# Altium PCB AT89S52多功能板.PcbDoc (part 3 of 5)
Units mm, origin at the board's own origin, x right, y up, seen from the top; angles counter-clockwise.
Board outline 152.4 x 101.6 mm, 2 copper layers (Top Layer, Bottom Layer); 140 components, 143 nets, 570 pads, 50 vias.
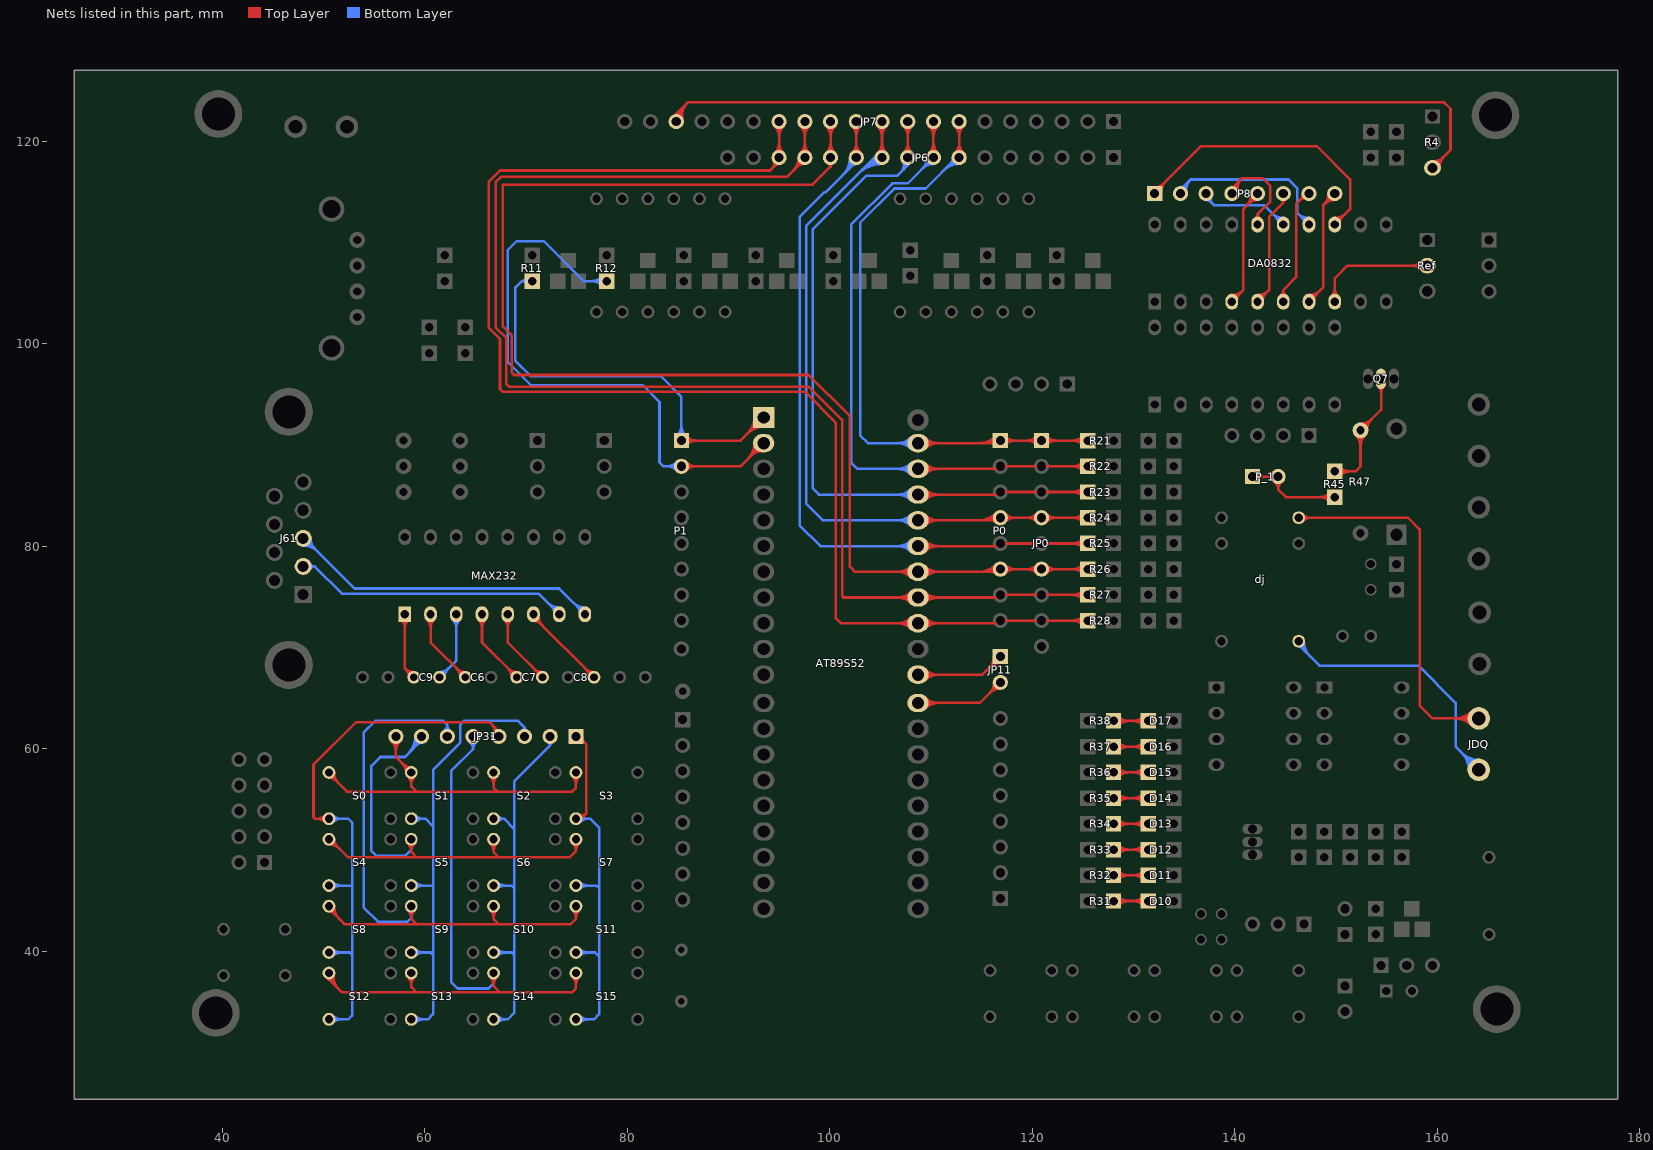
[diagram p3: the nets of this part, all layers, seen from the top]

## Via types
v1: diameter 1.27, hole 0.711, Top Layer to Bottom Layer, 50 vias

## Nets (pads, with @x,y where several pads share a name; then routed paths per layer and width w, separated by ;. In a path a pad name is that pad's centre, name@x,y a point inside that pad or via, vN(x,y) a via of type N, cw(c..) or ccw(c..) an arc to the next point about the centre after c; other vN are vias at no path point) (continued)
NetAT89S52_29: AT89S52.29 JP11.2 | length 17.6
  Top Layer w0.254: AT89S52.29@108.712,64.516 114.808,64.516 JP11.2@116.84,66.548 ; AT89S52.29@109.231,64.147 cw(c110.121,63.257) 110.121,64.516 cw(c110.121,65.775) AT89S52.29@109.231,64.885 ; AT89S52.29@109.41,63.968 cw(c110.734,62.644) 110.734,64.516 cw(c110.734,66.388) AT89S52.29@109.41,65.064 ; JP11.2@116.217,66.548 cw(c114.713,66.548) 115.776,65.484 cw(c116.84,64.421) JP11.2@116.84,65.925 ; JP11.2@116.471,66.548 cw(c115.58,66.548) 116.21,65.918 cw(c116.84,65.288) JP11.2@116.84,66.179
NetAT89S52_30: AT89S52.30 JP11.1 | length 17.5
  Top Layer w0.254: AT89S52.30@108.708,67.309 115.061,67.309 JP11.1@116.84,69.088 ; AT89S52.30@109.227,66.94 cw(c110.117,66.05) 110.117,67.309 cw(c110.117,68.568) AT89S52.30@109.227,67.678 ; AT89S52.30@109.406,66.761 cw(c110.73,65.437) 110.73,67.309 cw(c110.73,69.181) AT89S52.30@109.406,67.857 ; JP11.1@116.217,69.088 cw(c114.713,69.088) 115.776,68.024 cw(c116.84,66.961) JP11.1@116.84,68.465 ; JP11.1@116.471,69.088 cw(c115.58,69.088) 116.21,68.458 cw(c116.84,67.828) JP11.1@116.84,68.719
NetC6_1: C6.1 MAX232.2 | length 11.5
  Top Layer w0.254: MAX232.2@60.228,72.761 cw(c59.378,71.911) 60.58,71.911 cw(c61.782,71.911) MAX232.2@60.932,72.761 ; MAX232.2@60.58,73.275 60.58,70.484 C6.1@64.008,67.056 ; C6.1@63.5,67.056 ccw(c62.274,67.056) 63.141,67.923 ccw(c64.008,68.79) C6.1@64.008,67.564
NetC7_1: C7.1 MAX232.4 | length 11.5
  Top Layer w0.254: MAX232.4@65.308,72.761 cw(c64.458,71.911) 65.66,71.911 cw(c66.862,71.911) MAX232.4@66.012,72.761 ; MAX232.4@65.66,73.275 65.66,70.484 C7.1@69.088,67.056 ; C7.1@68.58,67.056 ccw(c67.354,67.056) 68.221,67.923 ccw(c69.088,68.79) C7.1@69.088,67.564
NetC7_2: C7.2 MAX232.5 | length 11.5
  Top Layer w0.254: MAX232.5@67.848,72.761 cw(c66.998,71.911) 68.2,71.911 cw(c69.402,71.911) MAX232.5@68.552,72.761 ; MAX232.5@68.2,73.275 68.2,70.484 C7.2@71.628,67.056 ; C7.2@71.12,67.056 ccw(c69.894,67.056) 70.761,67.923 ccw(c71.628,68.79) C7.2@71.628,67.564
NetC8_2: C8.2 MAX232.6 | length 13.1
  Top Layer w0.254: MAX232.6@70.74,72.615 cw(c70.74,71.627) 71.439,72.325 ; MAX232.6@70.74,73.275 70.74,73.024 C8.2@76.708,67.056 ; MAX232.6@70.984,73.113 ccw(c71.787,73.113) 71.219,72.545 ; MAX232.6@71.238,73.113 ccw(c72.655,73.113) 71.653,72.111 ; C8.2@76.2,67.056 ccw(c74.974,67.056) 75.841,67.923 ccw(c76.708,68.79) C8.2@76.708,67.564
NetC9_1: C9.1 MAX232.1 | length 10.4
  Top Layer w0.254: MAX232.1@57.688,72.761 cw(c56.838,71.911) 58.04,71.911 cw(c59.242,71.911) MAX232.1@58.392,72.761 ; MAX232.1@58.04,73.275 58.04,67.944 C9.1@58.928,67.056 ; C9.1@58.42,67.056 ccw(c57.194,67.056) 58.061,67.923 ccw(c58.928,68.79) C9.1@58.928,67.564
NetC9_2: C9.2 MAX232.3 | length 10.7
  Bottom Layer w0.254: C9.2@61.468,67.056 63.12,68.708 MAX232.3@63.12,73.275 ; C9.2@61.468,67.564 ccw(c61.468,68.79) 62.335,67.923 ccw(c63.202,67.056) C9.2@61.976,67.056 ; MAX232.3@62.768,72.761 cw(c61.918,71.911) 63.12,71.911 cw(c64.322,71.911) MAX232.3@63.472,72.761
NetD10_2: D10.2 R31.2 | length 11.3
  Top Layer w0.254: R31.2@128.016,44.958 D10.2@131.445,44.958 D10.2@131.318,44.831 ; R31.2@128.285,44.689 cw(c128.936,44.038) 128.936,44.958 cw(c128.936,45.878) R31.2@128.285,45.227 ; R31.2@128.465,44.509 cw(c129.549,43.425) 129.549,44.958 cw(c129.549,46.491) R31.2@128.465,45.407 ; D10.2@130.996,44.509 ccw(c129.912,43.425) 129.912,44.958 ccw(c129.912,46.491) D10.2@130.996,45.407 ; D10.2@131.176,44.689 ccw(c130.525,44.038) 130.525,44.958 ccw(c130.525,45.878) D10.2@131.176,45.227
NetD11_2: D11.2 R32.2 | length 11.3
  Top Layer w0.254: R32.2@128.016,47.498 D11.2@131.445,47.498 D11.2@131.318,47.371 ; R32.2@128.285,47.229 cw(c128.936,46.578) 128.936,47.498 cw(c128.936,48.418) R32.2@128.285,47.767 ; R32.2@128.465,47.049 cw(c129.549,45.965) 129.549,47.498 cw(c129.549,49.031) R32.2@128.465,47.947 ; D11.2@130.996,47.049 ccw(c129.912,45.965) 129.912,47.498 ccw(c129.912,49.031) D11.2@130.996,47.947 ; D11.2@131.176,47.229 ccw(c130.525,46.578) 130.525,47.498 ccw(c130.525,48.418) D11.2@131.176,47.767
NetD12_2: D12.2 R33.2 | length 11.3
  Top Layer w0.254: R33.2@128.016,50.038 D12.2@131.445,50.038 D12.2@131.318,49.911 ; R33.2@128.285,49.769 cw(c128.936,49.118) 128.936,50.038 cw(c128.936,50.958) R33.2@128.285,50.307 ; R33.2@128.465,49.589 cw(c129.549,48.505) 129.549,50.038 cw(c129.549,51.571) R33.2@128.465,50.487 ; D12.2@130.996,49.589 ccw(c129.912,48.505) 129.912,50.038 ccw(c129.912,51.571) D12.2@130.996,50.487 ; D12.2@131.176,49.769 ccw(c130.525,49.118) 130.525,50.038 ccw(c130.525,50.958) D12.2@131.176,50.307
NetD13_2: D13.2 R34.2 | length 11.3
  Top Layer w0.254: R34.2@128.016,52.578 D13.2@131.445,52.578 D13.2@131.318,52.451 ; R34.2@128.285,52.309 cw(c128.936,51.658) 128.936,52.578 cw(c128.936,53.498) R34.2@128.285,52.847 ; R34.2@128.465,52.129 cw(c129.549,51.045) 129.549,52.578 cw(c129.549,54.111) R34.2@128.465,53.027 ; D13.2@130.996,52.129 ccw(c129.912,51.045) 129.912,52.578 ccw(c129.912,54.111) D13.2@130.996,53.027 ; D13.2@131.176,52.309 ccw(c130.525,51.658) 130.525,52.578 ccw(c130.525,53.498) D13.2@131.176,52.847
NetD14_2: D14.2 R35.2 | length 11.1
  Top Layer w0.254: R35.2@128.016,55.118 D14.2@131.445,55.118 ; R35.2@128.285,54.849 cw(c128.936,54.198) 128.936,55.118 cw(c128.936,56.038) R35.2@128.285,55.387 ; R35.2@128.465,54.669 cw(c129.549,53.585) 129.549,55.118 cw(c129.549,56.651) R35.2@128.465,55.567 ; D14.2@130.996,54.669 ccw(c129.912,53.585) 129.912,55.118 ccw(c129.912,56.651) D14.2@130.996,55.567 ; D14.2@131.176,54.849 ccw(c130.525,54.198) 130.525,55.118 ccw(c130.525,56.038) D14.2@131.176,55.387
NetD15_2: D15.2 R36.2 | length 11.3
  Top Layer w0.254: R36.2@128.016,57.658 D15.2@131.445,57.658 D15.2@131.318,57.531 ; R36.2@128.285,57.389 cw(c128.936,56.738) 128.936,57.658 cw(c128.936,58.578) R36.2@128.285,57.927 ; R36.2@128.465,57.209 cw(c129.549,56.125) 129.549,57.658 cw(c129.549,59.191) R36.2@128.465,58.107 ; D15.2@130.996,57.209 ccw(c129.912,56.125) 129.912,57.658 ccw(c129.912,59.191) D15.2@130.996,58.107 ; D15.2@131.176,57.389 ccw(c130.525,56.738) 130.525,57.658 ccw(c130.525,58.578) D15.2@131.176,57.927
NetD16_2: D16.2 R37.2 | length 11.1
  Top Layer w0.254: R37.2@128.016,60.198 D16.2@131.445,60.198 ; R37.2@128.285,59.929 cw(c128.936,59.278) 128.936,60.198 cw(c128.936,61.118) R37.2@128.285,60.467 ; R37.2@128.465,59.749 cw(c129.549,58.665) 129.549,60.198 cw(c129.549,61.731) R37.2@128.465,60.647 ; D16.2@130.996,59.749 ccw(c129.912,58.665) 129.912,60.198 ccw(c129.912,61.731) D16.2@130.996,60.647 ; D16.2@131.176,59.929 ccw(c130.525,59.278) 130.525,60.198 ccw(c130.525,61.118) D16.2@131.176,60.467
NetD17_2: D17.2 R38.2 | length 11.3
  Top Layer w0.254: R38.2@128.016,62.738 D17.2@131.445,62.738 D17.2@131.318,62.611 ; R38.2@128.285,62.469 cw(c128.936,61.818) 128.936,62.738 cw(c128.936,63.658) R38.2@128.285,63.007 ; R38.2@128.465,62.289 cw(c129.549,61.205) 129.549,62.738 cw(c129.549,64.271) R38.2@128.465,63.187 ; D17.2@130.996,62.289 ccw(c129.912,61.205) 129.912,62.738 ccw(c129.912,64.271) D17.2@130.996,63.187 ; D17.2@131.176,62.469 ccw(c130.525,61.818) 130.525,62.738 ccw(c130.525,63.658) D17.2@131.176,63.007
NetDA0832_4: DA0832.4 P8.5 | length 17.7
  Top Layer w0.254: DA0832.4@139.701,104.136 140.843,105.278 140.843,113.284 142.24,114.681 P8.5@142.24,114.808 ; DA0832.4@139.701,104.543 ccw(c139.701,105.524) 140.395,104.83 ; DA0832.4@139.701,104.797 ccw(c139.701,106.391) 140.828,105.264 ; DA0832.4@140.199,104.299 cw(c141.009,104.299) 140.436,104.872 ; 141.087,113.528 ccw(c139.806,114.808) P8.5@141.617,114.808 ; 141.393,113.834 cw(c142.24,112.988) P8.5@142.24,114.185 ; 141.52,113.961 ccw(c140.674,114.808) P8.5@141.871,114.808
NetDA0832_5: DA0832.5 P8.6 | length 16.2
  Top Layer w0.254: DA0832.5@142.241,104.136 143.383,105.278 143.383,112.522 144.78,113.919 ; DA0832.5@142.241,104.543 ccw(c142.241,105.524) 142.935,104.83 ; DA0832.5@142.241,104.797 ccw(c142.241,106.391) 143.368,105.264 ; DA0832.5@142.739,104.299 cw(c143.549,104.299) 142.976,104.872 ; P8.6@144.526,114.808 P8.6@144.78,114.808 144.78,113.919 ; 144.78,113.919 ccw(c144.457,113.919) 144.567,114.222 cw(c144.457,113.919) 144.78,113.919 ; 144.78,113.919 cw(c145.103,113.919) 144.993,114.222 ccw(c145.103,113.919) 144.78,113.919
NetDA0832_6: DA0832.6 P8.7 | length 16.4
  Top Layer w0.254: DA0832.6@144.781,104.136 144.781,105.284 ; 146.325,114.067 cw(c147.229,113.163) P8.7@147.3,114.44 ; 146.436,114.178 ccw(c145.806,114.808) P8.7@146.697,114.808 ; P8.7@147.32,114.808 147.066,114.808 146.05,113.792 146.05,106.553 144.781,105.284 ; 144.781,105.284 ccw(c145.507,105.284) 145.076,104.7 cw(c145.507,105.284) 144.781,105.284 ; 144.781,105.284 cw(c144.055,105.284) 144.486,104.7 ccw(c144.055,105.284) 144.781,105.284
NetDA0832_7: DA0832.7 P8.8 | length 18.1
  Top Layer w0.254: DA0832.7@147.321,104.136 148.717,105.532 148.717,113.665 P8.8@149.86,114.808 ; DA0832.7@147.321,104.543 ccw(c147.321,105.524) 148.015,104.83 ; DA0832.7@147.321,104.797 ccw(c147.321,106.391) 148.448,105.264 ; DA0832.7@147.819,104.299 cw(c148.629,104.299) 148.056,104.872 ; P8.8@149.237,114.808 cw(c147.733,114.808) 148.796,113.744 cw(c149.86,112.681) P8.8@149.86,114.185 ; P8.8@149.491,114.808 cw(c148.6,114.808) 149.23,114.178 cw(c149.86,113.548) P8.8@149.86,114.439
NetDA0832_8: DA0832.8 Ref.3 | length 17.7
  Top Layer w0.254: DA0832.8@149.509,104.651 ccw(c148.659,105.501) 149.861,105.501 ccw(c151.063,105.501) DA0832.8@150.213,104.651 ; DA0832.8@149.861,104.136 149.861,106.427 151.13,107.696 Ref.3@159.004,107.696 ; Ref.3@158.491,107.247 ccw(c157.407,106.163) 157.407,107.696 ccw(c157.407,109.229) Ref.3@158.491,108.145 ; Ref.3@158.671,107.427 ccw(c158.021,106.776) 158.021,107.696 ccw(c158.021,108.616) Ref.3@158.671,107.965
NetDA0832_13: DA0832.13 P8.1 | length 33.7
  Top Layer w0.254: P8.1@132.08,114.808 132.08,114.935 136.652,119.507 148.082,119.507 151.384,116.205 151.384,113.279 DA0832.13@149.861,111.756 DA0832.13@149.86,111.757 ; P8.1@132.08,115.431 ccw(c132.08,116.628) 132.927,115.782 ; P8.1@132.449,114.808 cw(c133.646,114.808) 132.8,115.655 ; P8.1@132.703,114.808 cw(c134.514,114.808) 133.233,116.088 ; DA0832.13@149.861,112.163 ccw(c149.861,113.144) 150.555,112.45 ; DA0832.13@149.861,112.417 ccw(c149.861,114.011) 150.988,112.884 ; DA0832.13@150.359,111.919 cw(c151.169,111.919) 150.596,112.492
NetDA0832_14: DA0832.14 P8.2 | length 22.9
  Top Layer w0.254: DA0832.14@147.32,111.757 DA0832.14@147.321,111.756
  Bottom Layer w0.254: P8.2@134.62,114.808 134.62,115.189 135.636,116.205 ; P8.2@134.62,115.431 ccw(c134.62,116.015) 135.033,115.602 ; P8.2@134.733,114.828 cw(c135.501,114.967) 134.949,115.518 ; P8.2@134.983,114.873 cw(c136.082,115.072) 135.293,115.862 ; P8.2@135.233,114.919 cw(c136.664,115.177) 135.636,116.205 ; 146.258,112.819 ccw(c147.234,113.795) DA0832.14@147.298,112.416 ; 146.586,112.491 cw(c146.013,111.919) DA0832.14@146.823,111.919 ; 146.665,112.412 ccw(c147.27,113.017) DA0832.14@147.31,112.162 ; DA0832.14@147.321,111.756 146.177,112.9 146.177,115.316 145.288,116.205 135.636,116.205
NetDA0832_15: DA0832.15 P8.3 | length 15.3
  Top Layer w0.254: DA0832.15@144.78,111.757 DA0832.15@144.904,111.633
  Bottom Layer w0.254: P8.3@137.16,114.808 137.16,114.427 137.922,113.665 142.872,113.665 DA0832.15@144.781,111.756 ; 143.654,112.884 ccw(c144.781,114.011) DA0832.15@144.781,112.417 ; 144.046,112.491 cw(c143.473,111.919) DA0832.15@144.283,111.919 ; 144.087,112.45 ccw(c144.781,113.144) DA0832.15@144.781,112.163 ; P8.3@137.16,114.185 cw(c137.16,113.601) 137.573,114.014 ccw(c137.16,113.601) P8.3@137.16,114.185 ; P8.3@137.465,114.6 ccw(c137.809,114.366) 137.515,114.072 cw(c137.809,114.366) P8.3@137.465,114.6 ; P8.3@137.675,114.457 ccw(c138.067,114.191) 137.731,113.856 cw(c138.067,114.191) P8.3@137.675,114.457
NetDA0832_16: DA0832.16 P8.4 | length 15.1
  Top Layer w0.254: P8.4@139.7,114.808 139.7,115.316 140.716,116.332 ; P8.4@139.812,114.833 cw(c140.706,115.028) 140.059,115.675 ; P8.4@140.06,114.887 cw(c141.245,115.146) 140.388,116.004 ; P8.4@140.309,114.941 cw(c141.784,115.264) 140.716,116.332 ; DA0832.16@142.24,111.757 DA0832.16@142.241,111.756 142.241,112.777 ; 140.716,116.332 142.748,116.332 143.51,115.57 143.51,114.046 142.241,112.777 ; 142.241,112.777 ccw(c142.732,112.777) 142.488,112.351 cw(c142.732,112.777) 142.241,112.777 ; 142.241,112.777 cw(c141.75,112.777) 141.994,112.351 ccw(c141.75,112.777) 142.241,112.777
Netdj_2: dj.2 JDQ.1 | length 46.4
  Top Layer w0.254: dj.2@146.304,82.804 157.099,82.804 158.242,81.661 158.242,64.262 159.512,62.992 JDQ.1@164.084,62.992 ; dj.2@146.663,82.445 cw(c147.53,81.578) 147.53,82.804 cw(c147.53,84.03) dj.2@146.663,83.163 ; JDQ.1@163.388,62.296 ccw(c161.706,60.614) 161.706,62.992 ccw(c161.706,65.37) JDQ.1@163.388,63.688 ; JDQ.1@163.567,62.475 ccw(c162.319,61.227) 162.319,62.992 ccw(c162.319,64.757) JDQ.1@163.567,63.509 ; JDQ.1@163.747,62.655 ccw(c162.932,61.84) 162.932,62.992 ccw(c162.932,64.144) JDQ.1@163.747,63.329
Netdj_4: dj.4 JDQ.2 | length 38
  Bottom Layer w0.254: dj.4@146.304,70.104 cw(c146.304,69.797) 146.521,70.014 ; dj.4@146.558,70.612 ccw(c148.091,70.612) 147.007,69.528 ; 146.573,69.962 cw(c147.224,70.612) dj.4@146.304,70.612 146.304,70.231 148.336,68.199 158.115,68.199 161.798,64.516 161.798,60.198 JDQ.2@164.084,57.912 ; dj.4@146.812,70.612 ccw(c148.958,70.612) 147.441,69.094 ; JDQ.2@163.099,57.912 ccw(c160.721,57.912) 162.403,59.593 ccw(c164.084,61.275) JDQ.2@164.084,58.897 ; JDQ.2@163.353,57.912 ccw(c161.588,57.912) 162.836,59.16 ccw(c164.084,60.408) JDQ.2@164.084,58.643 ; JDQ.2@163.607,57.912 ccw(c162.455,57.912) 163.27,58.726 ccw(c164.084,59.541) JDQ.2@164.084,58.389
NetJ61_2: J61.2 MAX232.7 | length 32.2
  Bottom Layer w0.254: J61.2@48.004,78.002 49.125,78.002 ; 72.153,74.403 ccw(c73.28,75.53) MAX232.7@73.28,73.936 ; 72.545,74.011 cw(c71.972,73.438) MAX232.7@72.782,73.438 ; 72.586,73.969 ccw(c73.28,74.663) MAX232.7@73.28,73.682 ; MAX232.7@73.28,73.275 71.244,75.311 51.816,75.311 49.125,78.002 ; 49.125,78.002 ccw(c49.125,77.486) 48.656,77.702 cw(c49.125,77.486) 49.125,78.002 ; 49.125,78.002 cw(c49.125,78.518) 48.656,78.302 ccw(c49.125,78.518) 49.125,78.002
NetJ61_3: J61.3 MAX232.8 | length 38.1
  Bottom Layer w0.254: J61.3@48.004,80.054 cw(c48.004,78.009) 49.45,79.455 ; J61.3@48.004,80.308 cw(c48.004,78.876) 49.016,79.889 ; J61.3@48.004,80.772 48.133,80.772 53.086,75.819 73.276,75.819 MAX232.8@75.82,73.275 ; J61.3@48.468,80.772 ccw(c49.277,80.772) 48.705,80.2 ; J61.3@48.722,80.772 ccw(c50.144,80.772) 49.139,79.766 ; 74.693,74.403 ccw(c75.82,75.53) MAX232.8@75.82,73.936 ; 75.085,74.011 cw(c74.512,73.438) MAX232.8@75.322,73.438 ; 75.126,73.969 ccw(c75.82,74.663) MAX232.8@75.82,73.682
NetJP7_18: JP7.18 R4.2 | length 95.1
  Top Layer w0.254: JP7.18@84.7,121.892 cw(c85.705,122.099) 84.979,122.825 ; JP7.18@84.836,121.92 84.836,122.682 ; JP7.18@84.949,121.943 cw(c86.258,122.213) 85.313,123.159 ; JP7.18@85.197,121.995 cw(c86.81,122.327) 85.646,123.492 ; JP7.18@85.446,122.046 cw(c87.363,122.441) 85.979,123.825 ; R4.2@159.512,117.348 161.29,119.126 161.29,123.19 160.655,123.825 85.979,123.825 ; R4.2@159.576,117.729 ccw(c159.576,118.496) 160.118,117.954 ; R4.2@159.576,117.983 ccw(c159.576,119.363) 160.551,118.387 ; R4.2@159.957,117.348 cw(c161.03,117.348) 160.271,118.107 ; R4.2@160.21,117.348 cw(c161.897,117.348) 160.704,118.54 ; 84.836,122.682 ccw(c84.99,122.682) 84.96,122.531 cw(c84.99,122.682) 84.836,122.682 ; 84.836,122.682 cw(c84.682,122.682) 84.712,122.531 ccw(c84.682,122.682) 84.836,122.682 ; 84.836,122.682 85.979,123.825
NetJP31_1: JP31.1 S3.2 S7.2 S11.2 S15.2 | length 50.1
  Top Layer w0.254: S3.2@74.93,53.086 75.438,53.086 75.946,53.594 ; JP31.1@74.93,61.214 75.184,61.214 75.946,60.452 75.946,53.594 ; JP31.1@75.015,60.855 cw(c75.197,60.092) 75.751,60.647 ; JP31.1@75.553,61.214 ccw(c76.444,61.214) 75.814,60.584 ; 75.946,53.594 cw(c75.525,54.015) 75.204,53.514 ccw(c75.525,54.015) 75.946,53.594 ; S3.2@75.067,53.3 ccw(c75.351,53.743) 75.723,53.371 cw(c75.351,53.743) S3.2@75.067,53.3
  Bottom Layer w0.254: S15.2@74.93,33.274 76.708,33.274 77.216,33.782 77.216,52.197 76.327,53.086 S3.2@74.93,53.086 ; S11.2@74.93,39.878 76.835,39.878 77.216,39.497 ; S7.2@74.93,46.482 76.962,46.482 77.216,46.228 ; S15.2@75.289,32.915 cw(c76.156,32.048) 76.156,33.274 cw(c76.156,34.5) S15.2@75.289,33.633 ; S11.2@75.289,39.519 cw(c76.156,38.652) 76.156,39.878 cw(c76.156,41.104) S11.2@75.289,40.237 ; S7.2@75.289,46.123 cw(c76.156,45.256) 76.156,46.482 cw(c76.156,47.708) S7.2@75.289,46.841 ; S3.2@75.289,52.727 cw(c76.156,51.86) 76.156,53.086 cw(c76.156,54.312) S3.2@75.289,53.445
NetJP31_2: JP31.2 S2.2 S6.2 S10.2 S14.2 | length 46.6
  Bottom Layer w0.254: S14.2@66.802,33.274 68.199,33.274 68.834,33.909 68.834,56.769 72.39,60.325 ; S10.2@66.802,39.878 68.58,39.878 68.834,39.624 ; S6.2@66.802,46.482 68.58,46.482 68.834,46.228 ; S2.2@66.802,53.086 67.818,53.086 ; S14.2@67.161,32.915 cw(c68.028,32.048) 68.028,33.274 cw(c68.028,34.5) S14.2@67.161,33.633 ; S10.2@67.161,39.519 cw(c68.028,38.652) 68.028,39.878 cw(c68.028,41.104) S10.2@67.161,40.237 ; S6.2@67.161,46.123 cw(c68.028,45.256) 68.028,46.482 cw(c68.028,47.708) S6.2@67.161,46.841 ; S2.2@67.208,52.781 cw(c67.818,52.324) 67.818,53.086 ; S2.2@67.208,53.391 ccw(c67.818,53.848) 67.818,53.086 ; 68.834,52.07 67.818,53.086 ; JP31.2@72.39,61.214 72.39,60.325 ; 72.39,60.325 ccw(c72.067,60.325) 72.177,60.628 cw(c72.067,60.325) 72.39,60.325 ; 72.39,60.325 cw(c72.713,60.325) 72.603,60.628 ccw(c72.713,60.325) 72.39,60.325
NetJP31_3: JP31.3 S1.2 S5.2 S9.2 S13.2 | length 55.8
  Bottom Layer w0.254: S13.2@58.674,33.274 60.325,33.274 60.833,33.782 60.833,57.912 63.5,60.579 63.5,62.357 63.881,62.738 69.215,62.738 69.85,62.103 ; S9.2@58.674,39.878 60.579,39.878 60.833,39.624 ; S5.2@58.674,46.482 60.706,46.482 ; S1.2@58.674,53.086 60.071,53.086 60.833,52.324 ; S13.2@59.033,32.915 cw(c59.9,32.048) 59.9,33.274 cw(c59.9,34.5) S13.2@59.033,33.633 ; S9.2@59.033,39.519 cw(c59.9,38.652) 59.9,39.878 cw(c59.9,41.104) S9.2@59.033,40.237 ; S5.2@59.033,46.123 cw(c59.9,45.256) 59.9,46.482 cw(c59.9,47.708) S5.2@59.033,46.841 ; S1.2@59.033,52.727 cw(c59.9,51.86) 59.9,53.086 cw(c59.9,54.312) S1.2@59.033,53.445 ; JP31.3@69.85,61.214 69.85,62.103 ; 69.85,62.103 ccw(c70.173,62.103) 70.063,61.8 cw(c70.173,62.103) 69.85,62.103 ; 69.85,62.103 cw(c69.527,62.103) 69.637,61.8 ccw(c69.527,62.103) 69.85,62.103
NetJP31_4: JP31.4 S0.2 S4.2 S8.2 S12.2 | length 68.2
  Top Layer w0.254: S0.2@50.187,52.727 ccw(c49.32,51.86) 49.32,53.086 ccw(c49.32,54.312) S0.2@50.187,53.445 ; S0.2@50.546,53.086 49.149,53.086 49.022,53.213 49.022,58.42 53.213,62.611 66.421,62.611 67.31,61.722 JP31.4@67.31,61.214 ; 66.528,62.504 cw(c65.49,61.466) JP31.4@66.944,61.265 ; 66.89,62.142 cw(c66.125,61.378) JP31.4@67.196,61.23
  Bottom Layer w0.254: S12.2@50.546,33.274 52.451,33.274 52.832,33.655 52.832,52.705 52.451,53.086 S0.2@50.546,53.086 ; S8.2@50.546,39.878 52.578,39.878 52.832,39.624 ; S4.2@50.546,46.482 52.705,46.482 ; S12.2@50.905,32.915 cw(c51.772,32.048) 51.772,33.274 cw(c51.772,34.5) S12.2@50.905,33.633 ; S8.2@50.905,39.519 cw(c51.772,38.652) 51.772,39.878 cw(c51.772,41.104) S8.2@50.905,40.237 ; S4.2@50.905,46.123 cw(c51.772,45.256) 51.772,46.482 cw(c51.772,47.708) S4.2@50.905,46.841 ; S0.2@50.905,52.727 cw(c51.772,51.86) 51.772,53.086 cw(c51.772,54.312) S0.2@50.905,53.445
NetJP31_5: JP31.5 S12.1 S13.1 S14.1 S15.1 | length 76.6
  Top Layer w0.254: S12.1@50.795,37.797 ccw(c52.106,37.54) 51.161,36.596 ; 50.824,36.933 cw(c51.542,37.651) S12.1@50.546,37.846 50.546,37.211 51.816,35.941 74.549,35.941 74.93,36.322 S15.1@74.93,37.846 ; S12.1@51.044,37.748 ccw(c52.669,37.429) 51.498,36.259 ; S13.1@58.315,37.487 cw(c57.448,36.62) 58.674,36.62 cw(c59.9,36.62) S13.1@59.033,37.487 ; S13.1@58.674,37.846 58.674,36.449 59.182,35.941 ; S14.1@66.443,37.487 cw(c65.576,36.62) 66.802,36.62 cw(c68.028,36.62) S14.1@67.161,37.487 ; S14.1@66.802,37.846 66.802,36.576 67.437,35.941 ; S15.1@74.571,37.487 cw(c73.704,36.62) 74.93,36.62 cw(c76.156,36.62) S15.1@75.289,37.487
  Bottom Layer w0.254: JP31.5@64.389,60.721 cw(c63.787,59.944) 64.77,59.944 ; JP31.5@64.516,61.214 JP31.5@64.77,61.214 64.77,59.944 ; JP31.5@64.544,60.922 cw(c64.188,60.462) 64.77,60.462 cw(c65.352,60.462) JP31.5@64.996,60.922 ; JP31.5@65.151,60.721 ccw(c65.753,59.944) 64.77,59.944 ; S14.1@66.497,37.44 cw(c66.04,36.83) 66.802,36.83 ; S14.1@66.802,37.846 66.802,36.83 ; S14.1@67.107,37.44 ccw(c67.564,36.83) 66.802,36.83 ; 64.77,59.944 62.611,57.785 62.611,36.957 63.246,36.322 66.294,36.322 66.802,36.83
NetJP31_6: JP31.6 S8.1 S9.1 S10.1 S11.1 | length 76.6
  Top Layer w0.254: S8.1@50.546,43.942 cw(c50.546,43.329) 50.98,43.762 ; S8.1@50.546,44.45 50.546,44.196 52.07,42.672 74.422,42.672 74.93,43.18 S11.1@74.93,44.45 ; S8.1@50.8,44.45 ccw(c52.026,44.45) 51.159,43.583 ; S8.1@51.054,44.45 ccw(c52.894,44.45) 51.593,43.149 ; S9.1@58.315,44.091 cw(c57.448,43.224) 58.674,43.224 cw(c59.9,43.224) S9.1@59.033,44.091 ; S9.1@58.674,44.45 58.674,43.18 59.182,42.672 ; S10.1@66.443,44.091 cw(c65.576,43.224) 66.802,43.224 cw(c68.028,43.224) S10.1@67.161,44.091 ; S10.1@66.802,44.45 66.802,43.18 67.31,42.672 ; S11.1@74.571,44.091 cw(c73.704,43.224) 74.93,43.224 cw(c76.156,43.224) S11.1@75.289,44.091
  Bottom Layer w0.254: S9.1@58.334,44.073 cw(c57.642,43.307) 58.674,43.307 ; S9.1@58.674,44.45 58.674,43.307 ; S9.1@59.014,44.073 ccw(c59.706,43.307) 58.674,43.307 ; JP31.6@61.892,61.738 ccw(c61.493,62.357) 62.23,62.357 ; JP31.6@62.103,61.214 JP31.6@62.23,61.214 62.23,62.357 ; JP31.6@62.568,61.738 cw(c62.967,62.357) 62.23,62.357 ; 58.674,43.307 58.293,42.926 55.372,42.926 53.975,44.323 53.975,61.595 55.118,62.738 61.849,62.738 62.23,62.357
NetJP31_7: JP31.7 S4.1 S5.1 S6.1 S7.1 | length 65.1
  Top Layer w0.254: S4.1@50.546,50.546 cw(c50.546,49.013) 51.63,50.097 ; S4.1@50.546,50.8 cw(c50.546,49.88) 51.196,50.531 ; S4.1@50.546,51.054 50.673,51.054 52.451,49.276 74.295,49.276 74.93,49.911 ; S4.1@51.054,51.054 ccw(c51.974,51.054) 51.323,50.404 ; S5.1@58.315,50.695 cw(c57.448,49.828) 58.674,49.828 cw(c59.9,49.828) S5.1@59.033,50.695 ; S5.1@58.674,51.054 58.674,49.784 59.182,49.276 ; S6.1@66.443,50.695 cw(c65.576,49.828) 66.802,49.828 cw(c68.028,49.828) S6.1@67.161,50.695 ; S6.1@66.802,51.054 66.802,49.784 67.31,49.276 ; S7.1@74.59,50.677 cw(c73.898,49.911) 74.93,49.911 ; S7.1@74.93,51.054 74.93,49.911 ; S7.1@75.27,50.677 ccw(c75.962,49.911) 74.93,49.911
  Bottom Layer w0.254: 58.357,59.5 ccw(c56.643,61.214) JP31.7@59.067,61.214 ; S5.1@58.369,50.648 cw(c57.912,50.038) 58.674,50.038 ; S5.1@58.674,51.054 58.674,50.038 ; 58.791,59.934 ccw(c57.51,61.214) JP31.7@59.321,61.214 ; S5.1@58.979,50.648 ccw(c59.436,50.038) 58.674,50.038 ; 59.224,60.367 ccw(c58.378,61.214) JP31.7@59.575,61.214 ; 59.277,60.42 cw(c59.69,60.007) JP31.7@59.69,60.591 ; JP31.7@59.69,61.214 59.69,60.833 58.039,59.182 55.626,59.182 54.737,58.293 54.737,49.911 55.245,49.403 58.039,49.403 58.674,50.038
NetJP31_8: JP31.8 S0.1 S1.1 S2.1 S3.1 | length 49.4
  Top Layer w0.254: S0.1@50.546,57.15 cw(c50.546,56.23) 51.196,56.881 ; S0.1@50.546,57.658 50.546,57.531 52.324,55.753 74.549,55.753 74.93,56.134 S3.1@74.93,57.658 ; S0.1@50.8,57.658 ccw(c51.72,57.658) 51.069,57.008 ; S0.1@51.054,57.658 ccw(c52.587,57.658) 51.503,56.574 ; JP31.8@56.709,60.773 cw(c55.646,59.71) 57.15,59.71 cw(c58.654,59.71) JP31.8@57.591,60.773 ; JP31.8@56.889,60.953 cw(c56.259,60.323) 57.15,60.323 cw(c58.041,60.323) JP31.8@57.411,60.953 ; JP31.8@57.15,61.214 57.15,59.182 S1.1@58.674,57.658 58.674,56.261 59.182,55.753 ; S1.1@58.166,57.658 ccw(c56.94,57.658) 57.807,58.525 ccw(c58.674,59.392) S1.1@58.674,58.166 ; S1.1@58.315,57.299 cw(c57.448,56.432) 58.674,56.432 cw(c59.9,56.432) S1.1@59.033,57.299 ; S2.1@66.443,57.299 cw(c65.576,56.432) 66.802,56.432 cw(c68.028,56.432) S2.1@67.161,57.299 ; S2.1@66.802,57.658 66.802,56.134 67.183,55.753 ; S3.1@74.571,57.299 cw(c73.704,56.432) 74.93,56.432 cw(c76.156,56.432) S3.1@75.289,57.299
NetP_1_2: P_1.1 P_1.2 R45.2 | length 16.4
  Top Layer w0.254: P_1.1@141.732,86.868 P_1.2@144.272,86.868 144.272,85.598 ; P_1.2@143.891,86.375 cw(c143.289,85.598) 144.272,85.598 ; P_1.2@144.046,86.576 cw(c143.69,86.116) 144.272,86.116 cw(c144.854,86.116) P_1.2@144.498,86.576 ; P_1.2@144.653,86.375 ccw(c145.255,85.598) 144.272,85.598 ; R45.2@149.411,84.387 ccw(c148.327,83.303) 148.327,84.836 ccw(c148.327,86.369) R45.2@149.411,85.285 ; R45.2@149.591,84.567 ccw(c148.94,83.916) 148.94,84.836 ccw(c148.94,85.756) R45.2@149.591,85.105 ; R45.2@149.86,84.836 145.034,84.836 144.272,85.598
NetQ7_2: Q7.2 R45.1 R47.2 | length 25.6
  Top Layer w0.254: R45.1@149.86,87.376 151.892,87.376 152.401,87.885 R47.2@152.401,91.436 154.432,93.467 Q7.2@154.432,96.52 ; R45.1@150.129,87.107 cw(c150.78,86.456) 150.78,87.376 cw(c150.78,88.296) R45.1@150.129,87.645 ; R45.1@150.309,86.927 cw(c151.393,85.843) 151.393,87.376 cw(c151.393,88.909) R45.1@150.309,87.825 ; R47.2@151.934,90.969 cw(c150.807,89.842) 152.401,89.842 cw(c153.995,89.842) R47.2@152.868,90.969 ; R47.2@152.114,91.149 cw(c151.42,90.455) 152.401,90.455 cw(c153.382,90.455) R47.2@152.688,91.149 ; R47.2@152.401,91.843 ccw(c152.401,92.824) 153.095,92.13 ccw(c153.789,91.436) R47.2@152.807,91.436 ; R47.2@152.401,92.097 ccw(c152.401,93.691) 153.528,92.564 ccw(c154.656,91.436) R47.2@153.061,91.436 ; Q7.2@154.168,95.756 cw(c153.532,95.12) 154.432,95.12 cw(c155.332,95.12) Q7.2@154.696,95.756
P00: 
P00: AT89S52.39 JP0.1 JP6.7 JP7.7 P0.1 R21.1 | length 100.9
  Top Layer w0.254: AT89S52.39@108.708,90.169 116.585,90.169 P0.1@116.84,90.424 R21.1@125.476,90.424 ; AT89S52.39@109.227,89.8 cw(c110.117,88.91) 110.117,90.169 cw(c110.117,91.428) AT89S52.39@109.227,90.538 ; AT89S52.39@109.406,89.621 cw(c110.73,88.297) 110.73,90.169 cw(c110.73,92.041) AT89S52.39@109.406,90.717 ; JP6.7@112.335,118.805 ccw(c111.272,119.868) 112.776,119.868 ccw(c114.28,119.868) JP6.7@113.217,118.805 ; JP7.7@112.335,121.479 cw(c111.272,120.416) 112.776,120.416 cw(c114.28,120.416) JP7.7@113.217,121.479 ; JP6.7@112.515,118.625 ccw(c111.885,119.255) 112.776,119.255 ccw(c113.667,119.255) JP6.7@113.037,118.625 ; JP7.7@112.515,121.659 cw(c111.885,121.029) 112.776,121.029 cw(c113.667,121.029) JP7.7@113.037,121.659 ; JP6.7@112.776,118.364 JP7.7@112.776,121.92 ; 114.72,90.169 ccw(c114.72,92.544) P0.1@116.399,90.865 ; 115.333,90.169 ccw(c115.333,91.931) P0.1@116.579,90.685 ; 115.947,90.169 ccw(c115.947,91.317) P0.1@116.759,90.505 ; 115.952,90.169 cw(c115.952,89.536) P0.1@116.399,89.983 ; P0.1@117.101,90.163 cw(c117.731,89.533) 117.731,90.424 cw(c117.731,91.315) P0.1@117.101,90.685 ; P0.1@117.281,89.983 cw(c118.344,88.92) 118.344,90.424 cw(c118.344,91.928) P0.1@117.281,90.865 ; JP0.1@120.463,89.983 ccw(c119.4,88.92) 119.4,90.424 ccw(c119.4,91.928) JP0.1@120.463,90.865 ; JP0.1@120.643,90.163 ccw(c120.013,89.533) 120.013,90.424 ccw(c120.013,91.315) JP0.1@120.643,90.685 ; JP0.1@121.165,90.163 cw(c121.795,89.533) 121.795,90.424 cw(c121.795,91.315) JP0.1@121.165,90.685 ; JP0.1@121.345,89.983 cw(c122.408,88.92) 122.408,90.424 cw(c122.408,91.928) JP0.1@121.345,90.865 ; R21.1@125.027,89.975 ccw(c123.943,88.891) 123.943,90.424 ccw(c123.943,91.957) R21.1@125.027,90.873 ; R21.1@125.095,90.424 R21.1@125.349,90.17 ; R21.1@125.207,90.155 ccw(c124.556,89.504) 124.556,90.424 ccw(c124.556,91.344) R21.1@125.207,90.693
  Bottom Layer w0.254: AT89S52.39@108.01,89.621 ccw(c106.686,88.297) 106.686,90.169 ccw(c106.686,92.041) AT89S52.39@108.01,90.717 ; AT89S52.39@108.19,89.8 ccw(c107.299,88.91) 107.299,90.169 ccw(c107.299,91.428) AT89S52.39@108.19,90.538 ; AT89S52.39@108.708,90.169 103.76,90.169 102.997,90.932 102.997,111.931 106.382,115.316 109.474,115.316 112.522,118.364 JP6.7@112.776,118.364 ; 111.279,117.121 cw(c112.776,115.624) JP6.7@112.776,117.741 ; 111.712,117.554 cw(c112.776,116.491) JP6.7@112.776,117.995 ; 111.892,117.734 ccw(c111.262,118.364) JP6.7@112.153,118.364
P01: AT89S52.38 JP6.8 JP7.8 R22.1 | length 86.6
  Top Layer w0.254: AT89S52.38@108.708,87.629 116.585,87.629 116.84,87.884 R22.1@125.476,87.884 ; AT89S52.38@109.227,87.26 cw(c110.117,86.37) 110.117,87.629 cw(c110.117,88.888) AT89S52.38@109.227,87.998 ; AT89S52.38@109.406,87.081 cw(c110.73,85.757) 110.73,87.629 cw(c110.73,89.501) AT89S52.38@109.406,88.177 ; JP6.8@109.795,118.805 ccw(c108.732,119.868) 110.236,119.868 ccw(c111.74,119.868) JP6.8@110.677,118.805 ; JP7.8@109.795,121.479 cw(c108.732,120.416) 110.236,120.416 cw(c111.74,120.416) JP7.8@110.677,121.479 ; JP6.8@109.975,118.625 ccw(c109.345,119.255) 110.236,119.255 ccw(c111.127,119.255) JP6.8@110.497,118.625 ; JP7.8@109.975,121.659 cw(c109.345,121.029) 110.236,121.029 cw(c111.127,121.029) JP7.8@110.497,121.659 ; JP6.8@110.236,118.364 JP7.8@110.236,121.92 ; R22.1@125.027,87.435 ccw(c123.943,86.351) 123.943,87.884 ccw(c123.943,89.417) R22.1@125.027,88.333 ; R22.1@125.207,87.615 ccw(c124.556,86.964) 124.556,87.884 ccw(c124.556,88.804) R22.1@125.207,88.153
  Bottom Layer w0.254: AT89S52.38@108.01,87.081 ccw(c106.686,85.757) 106.686,87.629 ccw(c106.686,89.501) AT89S52.38@108.01,88.177 ; AT89S52.38@108.19,87.26 ccw(c107.299,86.37) 107.299,87.629 ccw(c107.299,88.888) AT89S52.38@108.19,87.998 ; AT89S52.38@108.708,87.629 102.744,87.629 102.108,88.265 102.108,111.76 106.172,115.824 107.696,115.824 JP6.8@110.236,118.364 ; JP6.8@109.613,118.364 cw(c108.109,118.364) 109.172,117.3 cw(c110.236,116.237) JP6.8@110.236,117.741 ; JP6.8@109.867,118.364 cw(c108.976,118.364) 109.606,117.734 cw(c110.236,117.104) JP6.8@110.236,117.995
P02: AT89S52.37 JP6.9 JP7.9 R23.1 | length 95
  Top Layer w0.254: JP6.9@107.255,118.805 ccw(c106.192,119.868) 107.696,119.868 ccw(c109.2,119.868) JP6.9@108.137,118.805 ; JP7.9@107.255,121.479 cw(c106.192,120.416) 107.696,120.416 cw(c109.2,120.416) JP7.9@108.137,121.479 ; JP6.9@107.435,118.625 ccw(c106.805,119.255) 107.696,119.255 ccw(c108.587,119.255) JP6.9@107.957,118.625 ; JP7.9@107.435,121.659 cw(c106.805,121.029) 107.696,121.029 cw(c108.587,121.029) JP7.9@107.957,121.659 ; JP6.9@107.696,118.364 JP7.9@107.696,121.92 ; AT89S52.37@108.708,85.089 116.585,85.089 116.84,85.344 R23.1@125.476,85.344 ; AT89S52.37@109.227,84.72 cw(c110.117,83.83) 110.117,85.089 cw(c110.117,86.348) AT89S52.37@109.227,85.458 ; AT89S52.37@109.406,84.541 cw(c110.73,83.217) 110.73,85.089 cw(c110.73,86.961) AT89S52.37@109.406,85.637 ; R23.1@125.027,84.895 ccw(c123.943,83.811) 123.943,85.344 ccw(c123.943,86.877) R23.1@125.027,85.793 ; R23.1@125.095,85.344 R23.1@125.349,85.09 ; R23.1@125.207,85.075 ccw(c124.556,84.424) 124.556,85.344 ccw(c124.556,86.264) R23.1@125.207,85.613
  Bottom Layer w0.254: 107.061,116.967 ccw(c106.463,117.565) JP6.9@107.173,118.025 ; 107.283,117.189 ccw(c106.732,117.74) JP6.9@107.386,118.163 ; 107.505,117.411 ccw(c107.002,117.915) JP6.9@107.599,118.302 ; JP6.9@107.696,118.364 107.696,117.602 ; AT89S52.37@108.01,84.541 ccw(c106.686,83.217) 106.686,85.089 ccw(c106.686,86.961) AT89S52.37@108.01,85.637 ; AT89S52.37@108.19,84.72 ccw(c107.299,83.83) 107.299,85.089 ccw(c107.299,86.348) AT89S52.37@108.19,85.458 ; AT89S52.37@108.708,85.089 98.934,85.089 98.298,85.725 98.298,111.252 103.632,116.586 106.68,116.586 107.696,117.602 ; 107.696,117.602 ccw(c107.542,117.602) 107.572,117.753 cw(c107.542,117.602) 107.696,117.602 ; 107.696,117.602 cw(c107.85,117.602) 107.82,117.753 ccw(c107.85,117.602) 107.696,117.602
P03: 
P03: AT89S52.36 JP0.4 JP6.10 JP7.10 P0.4 R24.1 | length 115.8
  Top Layer w0.254: JP6.10@104.715,118.805 ccw(c103.652,119.868) 105.156,119.868 ccw(c106.66,119.868) JP6.10@105.597,118.805 ; JP7.10@104.715,121.479 cw(c103.652,120.416) 105.156,120.416 cw(c106.66,120.416) JP7.10@105.597,121.479 ; JP6.10@104.895,118.625 ccw(c104.265,119.255) 105.156,119.255 ccw(c106.047,119.255) JP6.10@105.417,118.625 ; JP7.10@104.895,121.659 cw(c104.265,121.029) 105.156,121.029 cw(c106.047,121.029) JP7.10@105.417,121.659 ; JP6.10@105.156,118.364 JP7.10@105.156,121.92 ; AT89S52.36@108.708,82.549 116.585,82.549 P0.4@116.84,82.804 R24.1@125.476,82.804 ; AT89S52.36@109.227,82.18 cw(c110.117,81.29) 110.117,82.549 cw(c110.117,83.808) AT89S52.36@109.227,82.918 ; AT89S52.36@109.406,82.001 cw(c110.73,80.677) 110.73,82.549 cw(c110.73,84.421) AT89S52.36@109.406,83.097 ; 114.72,82.549 ccw(c114.72,84.924) P0.4@116.399,83.245 ; 115.333,82.549 ccw(c115.333,84.311) P0.4@116.579,83.065 ; 115.947,82.549 ccw(c115.947,83.697) P0.4@116.759,82.885 ; 115.952,82.549 cw(c115.952,81.916) P0.4@116.399,82.363 ; P0.4@117.101,82.543 cw(c117.731,81.913) 117.731,82.804 cw(c117.731,83.695) P0.4@117.101,83.065 ; P0.4@117.281,82.363 cw(c118.344,81.3) 118.344,82.804 cw(c118.344,84.308) P0.4@117.281,83.245 ; JP0.4@120.463,82.363 ccw(c119.4,81.3) 119.4,82.804 ccw(c119.4,84.308) JP0.4@120.463,83.245 ; JP0.4@120.643,82.543 ccw(c120.013,81.913) 120.013,82.804 ccw(c120.013,83.695) JP0.4@120.643,83.065 ; JP0.4@121.165,82.543 cw(c121.795,81.913) 121.795,82.804 cw(c121.795,83.695) JP0.4@121.165,83.065 ; JP0.4@121.345,82.363 cw(c122.408,81.3) 122.408,82.804 cw(c122.408,84.308) JP0.4@121.345,83.245 ; R24.1@125.027,82.355 ccw(c123.943,81.271) 123.943,82.804 ccw(c123.943,84.337) R24.1@125.027,83.253 ; R24.1@125.095,82.804 R24.1@125.349,82.55 ; R24.1@125.207,82.535 ccw(c124.556,81.884) 124.556,82.804 ccw(c124.556,83.724) R24.1@125.207,83.073
  Bottom Layer w0.254: 102.792,116.762 cw(c105.156,114.397) JP6.10@105.156,117.741 ; 103.225,117.195 cw(c105.156,115.265) JP6.10@105.156,117.995 ; 103.659,117.629 cw(c105.156,116.132) JP6.10@105.156,118.249 ; 104.092,118.062 cw(c105.156,116.999) JP6.10@105.156,118.503 ; JP6.10@105.156,118.364 104.394,118.364 ; AT89S52.36@108.01,82.001 ccw(c106.686,80.677) 106.686,82.549 ccw(c106.686,84.421) AT89S52.36@108.01,83.097 ; AT89S52.36@108.19,82.18 ccw(c107.299,81.29) 107.299,82.549 ccw(c107.299,83.808) AT89S52.36@108.19,82.918 ; AT89S52.36@108.708,82.549 99.315,82.549 97.663,84.201 97.663,111.633 104.394,118.364 ; 104.394,118.364 ccw(c104.394,118.518) 104.545,118.488 cw(c104.394,118.518) 104.394,118.364 ; 104.394,118.364 cw(c104.394,118.21) 104.545,118.24 ccw(c104.394,118.21) 104.394,118.364
P04: AT89S52.35 JP6.11 JP7.11 R25.1 | length 98
  Top Layer w0.254: JP6.11@102.175,118.805 ccw(c101.112,119.868) 102.616,119.868 ccw(c104.12,119.868) JP6.11@103.057,118.805 ; JP7.11@102.175,121.479 cw(c101.112,120.416) 102.616,120.416 cw(c104.12,120.416) JP7.11@103.057,121.479 ; JP6.11@102.355,118.625 ccw(c101.725,119.255) 102.616,119.255 ccw(c103.507,119.255) JP6.11@102.877,118.625 ; JP7.11@102.355,121.659 cw(c101.725,121.029) 102.616,121.029 cw(c103.507,121.029) JP7.11@102.877,121.659 ; JP6.11@102.616,118.364 JP7.11@102.616,121.92 ; AT89S52.35@108.708,80.009 116.585,80.009 116.84,80.264 R25.1@125.476,80.264 ; AT89S52.35@109.227,79.64 cw(c110.117,78.75) 110.117,80.009 cw(c110.117,81.268) AT89S52.35@109.227,80.378 ; AT89S52.35@109.406,79.461 cw(c110.73,78.137) 110.73,80.009 cw(c110.73,81.881) AT89S52.35@109.406,80.557 ; R25.1@125.027,79.815 ccw(c123.943,78.731) 123.943,80.264 ccw(c123.943,81.797) R25.1@125.027,80.713 ; R25.1@125.095,80.264 R25.1@125.349,80.01 ; R25.1@125.207,79.995 ccw(c124.556,79.344) 124.556,80.264 ccw(c124.556,81.184) R25.1@125.207,80.533
  Bottom Layer w0.254: 101.283,116.65 ccw(c99.569,118.364) JP6.11@101.993,118.364 ; 101.717,117.084 ccw(c100.436,118.364) JP6.11@102.247,118.364 ; 102.15,117.517 ccw(c101.304,118.364) JP6.11@102.501,118.364 ; 102.203,117.57 cw(c102.616,117.157) JP6.11@102.616,117.741 ; JP6.11@102.616,118.364 102.616,117.983 99.568,114.935 99.441,114.935 97.028,112.522 97.028,82.042 99.061,80.009 AT89S52.35@108.708,80.009 ; AT89S52.35@108.01,79.461 ccw(c106.686,78.137) 106.686,80.009 ccw(c106.686,81.881) AT89S52.35@108.01,80.557 ; AT89S52.35@108.19,79.64 ccw(c107.299,78.75) 107.299,80.009 ccw(c107.299,81.268) AT89S52.35@108.19,80.378
P05: 
P05: AT89S52.34 JP0.6 JP6.12 JP7.12 P0.6 R26.1 | length 169.1
  Top Layer w0.254: JP6.12@99.635,118.805 ccw(c98.572,119.868) 100.076,119.868 ccw(c101.58,119.868) JP6.12@100.517,118.805 ; JP7.12@99.635,121.479 cw(c98.572,120.416) 100.076,120.416 cw(c101.58,120.416) JP7.12@100.517,121.479 ; JP6.12@99.815,118.625 ccw(c99.185,119.255) 100.076,119.255 ccw(c100.967,119.255) JP6.12@100.337,118.625 ; JP7.12@99.815,121.659 cw(c99.185,121.029) 100.076,121.029 cw(c100.967,121.029) JP7.12@100.337,121.659 ; JP7.12@100.076,121.92 100.076,117.475 ; AT89S52.34@108.01,76.921 ccw(c106.686,75.597) 106.686,77.469 ccw(c106.686,79.341) AT89S52.34@108.01,78.017 ; AT89S52.34@108.19,77.1 ccw(c107.299,76.21) 107.299,77.469 ccw(c107.299,78.728) AT89S52.34@108.19,77.838 ; AT89S52.34@109.227,77.1 cw(c110.117,76.21) 110.117,77.469 cw(c110.117,78.728) AT89S52.34@109.227,77.838 ; AT89S52.34@109.406,76.921 cw(c110.73,75.597) 110.73,77.469 cw(c110.73,79.341) AT89S52.34@109.406,78.017 ; 114.72,77.469 ccw(c114.72,79.844) P0.6@116.399,78.165 ; 115.333,77.469 ccw(c115.333,79.231) P0.6@116.579,77.985 ; 115.947,77.469 ccw(c115.947,78.617) P0.6@116.759,77.805 ; 115.952,77.469 cw(c115.952,76.836) P0.6@116.399,77.283 ; P0.6@117.101,77.463 cw(c117.731,76.833) 117.731,77.724 cw(c117.731,78.615) P0.6@117.101,77.985 ; P0.6@117.281,77.283 cw(c118.344,76.22) 118.344,77.724 cw(c118.344,79.228) P0.6@117.281,78.165 ; JP0.6@120.463,77.283 ccw(c119.4,76.22) 119.4,77.724 ccw(c119.4,79.228) JP0.6@120.463,78.165 ; JP0.6@120.643,77.463 ccw(c120.013,76.833) 120.013,77.724 ccw(c120.013,78.615) JP0.6@120.643,77.985 ; JP0.6@121.165,77.463 cw(c121.795,76.833) 121.795,77.724 cw(c121.795,78.615) JP0.6@121.165,77.985 ; JP0.6@121.345,77.283 cw(c122.408,76.22) 122.408,77.724 cw(c122.408,79.228) JP0.6@121.345,78.165 ; R26.1@125.027,77.275 ccw(c123.943,76.191) 123.943,77.724 ccw(c123.943,79.257) R26.1@125.027,78.173 ; R26.1@125.207,77.455 ccw(c124.556,76.804) 124.556,77.724 ccw(c124.556,78.644) R26.1@125.207,77.993 ; R26.1@125.476,77.724 P0.6@116.84,77.724 116.585,77.469 102.49,77.469 101.981,77.978 101.981,92.837 97.917,96.901 68.834,96.901 68.58,97.155 68.58,100.838 67.687,101.731 67.687,101.764 67.691,101.768 67.691,115.697 98.298,115.697 100.076,117.475 ; 100.076,117.475 ccw(c99.753,117.475) 99.863,117.778 cw(c99.753,117.475) 100.076,117.475 ; 100.076,117.475 cw(c100.399,117.475) 100.289,117.778 ccw(c100.399,117.475) 100.076,117.475
P06: AT89S52.33 JP6.13 JP7.13 R27.1 | length 156.5
  Top Layer w0.254: 96.383,117.084 ccw(c95.102,118.364) JP6.13@96.913,118.364 ; 96.689,117.39 cw(c97.536,116.544) JP6.13@97.536,117.741 ; 96.816,117.517 ccw(c95.97,118.364) JP6.13@97.167,118.364 ; JP6.13@97.095,118.805 ccw(c96.032,119.868) 97.536,119.868 ccw(c99.04,119.868) JP6.13@97.977,118.805 ; JP7.13@97.095,121.479 cw(c96.032,120.416) 97.536,120.416 cw(c99.04,120.416) JP7.13@97.977,121.479 ; JP6.13@97.275,118.625 ccw(c96.645,119.255) 97.536,119.255 ccw(c98.427,119.255) JP6.13@97.797,118.625 ; JP7.13@97.275,121.659 cw(c96.645,121.029) 97.536,121.029 cw(c98.427,121.029) JP7.13@97.797,121.659 ; JP7.13@97.536,121.92 97.536,118.237 95.758,116.459 67.52,116.459 67.01,115.949 67.01,101.602 68.072,100.54 68.072,96.012 68.326,95.758 97.917,95.758 101.219,92.456 101.219,75.057 101.347,74.929 116.585,74.929 116.84,75.184 R27.1@125.476,75.184 ; AT89S52.33@108.01,74.381 ccw(c106.686,73.057) 106.686,74.929 ccw(c106.686,76.801) AT89S52.33@108.01,75.477 ; AT89S52.33@108.19,74.56 ccw(c107.299,73.67) 107.299,74.929 ccw(c107.299,76.188) AT89S52.33@108.19,75.298 ; AT89S52.33@109.227,74.56 cw(c110.117,73.67) 110.117,74.929 cw(c110.117,76.188) AT89S52.33@109.227,75.298 ; AT89S52.33@109.406,74.381 cw(c110.73,73.057) 110.73,74.929 cw(c110.73,76.801) AT89S52.33@109.406,75.477 ; R27.1@125.027,74.735 ccw(c123.943,73.651) 123.943,75.184 ccw(c123.943,76.717) R27.1@125.027,75.633 ; R27.1@125.207,74.915 ccw(c124.556,74.264) 124.556,75.184 ccw(c124.556,76.104) R27.1@125.207,75.453
P07: AT89S52.32 JP6.14 JP7.14 R28.1 | length 158.7
  Top Layer w0.254: JP6.14@94.555,118.805 ccw(c93.492,119.868) 94.996,119.868 ccw(c96.5,119.868) JP6.14@95.437,118.805 ; JP7.14@94.555,121.479 cw(c93.492,120.416) 94.996,120.416 cw(c96.5,120.416) JP7.14@95.437,121.479 ; JP6.14@94.735,118.625 ccw(c94.105,119.255) 94.996,119.255 ccw(c95.887,119.255) JP6.14@95.257,118.625 ; JP7.14@94.735,121.659 cw(c94.105,121.029) 94.996,121.029 cw(c95.887,121.029) JP7.14@95.257,121.659 ; JP7.14@94.996,121.92 94.996,117.983 94.107,117.094 67.437,117.094 66.319,115.976 66.319,101.61 66.302,101.592 67.437,100.457 67.437,95.504 67.691,95.25 97.536,95.25 100.584,92.202 100.584,72.898 101.093,72.389 116.585,72.389 116.84,72.644 R28.1@125.476,72.644 ; AT89S52.32@108.01,71.841 ccw(c106.686,70.517) 106.686,72.389 ccw(c106.686,74.261) AT89S52.32@108.01,72.937 ; AT89S52.32@108.19,72.02 ccw(c107.299,71.13) 107.299,72.389 ccw(c107.299,73.648) AT89S52.32@108.19,72.758 ; AT89S52.32@109.227,72.02 cw(c110.117,71.13) 110.117,72.389 cw(c110.117,73.648) AT89S52.32@109.227,72.758 ; AT89S52.32@109.406,71.841 cw(c110.73,70.517) 110.73,72.389 cw(c110.73,74.261) AT89S52.32@109.406,72.937 ; R28.1@125.027,72.195 ccw(c123.943,71.111) 123.943,72.644 ccw(c123.943,74.177) R28.1@125.027,73.093 ; R28.1@125.207,72.375 ccw(c124.556,71.724) 124.556,72.644 ccw(c124.556,73.564) R28.1@125.207,72.913 ; 94.298,117.285 ccw(c93.796,117.786) 94.435,118.093 cw(c93.796,117.786) 94.298,117.285 ; 94.551,117.538 ccw(c94.138,117.95) 94.664,118.204 cw(c94.138,117.95) 94.551,117.538 ; 94.583,117.57 cw(c94.996,117.157) 94.996,117.741 ccw(c94.996,117.157) 94.583,117.57
P10: 
P10: AT89S52.1 P1.1 R11.1 | length 56.2
  Top Layer w0.254: P1.1@85.344,90.424 91.183,90.424 AT89S52.1@93.468,92.709 ; P1.1@85.605,90.163 cw(c86.235,89.533) 86.235,90.424 cw(c86.235,91.315) P1.1@85.605,90.685 ; P1.1@85.785,89.983 cw(c86.848,88.92) 86.848,90.424 cw(c86.848,91.928) P1.1@85.785,90.865 ; AT89S52.1@92.543,92.709 cw(c90.309,92.709) 91.888,91.129 cw(c93.468,89.549) AT89S52.1@93.468,91.784 ; AT89S52.1@92.797,92.709 cw(c91.176,92.709) 92.322,91.563 cw(c93.468,90.417) AT89S52.1@93.468,92.038
  Bottom Layer w0.254: R11.1@70.612,106.172 69.596,106.172 ; P1.1@84.903,90.865 ccw(c83.84,91.928) 85.344,91.928 ccw(c86.848,91.928) P1.1@85.785,90.865 ; P1.1@85.083,90.685 ccw(c84.453,91.315) 85.344,91.315 ccw(c86.235,91.315) P1.1@85.605,90.685 ; P1.1@85.344,90.424 85.344,94.742 83.312,96.774 70.485,96.774 68.961,98.298 68.961,105.537 69.596,106.172 ; 69.596,106.172 ccw(c69.596,106.667) 70.041,106.45 cw(c69.596,106.667) 69.596,106.172 ; 69.596,106.172 cw(c69.596,105.677) 70.041,105.894 ccw(c69.596,105.677) 69.596,106.172
P11: 